# Altium PCB PCBnew.PcbDoc (part 2 of 2)
Units mil, origin at the board's own origin, x right, y up, seen from the top; angles counter-clockwise.
Board outline 9000 x 6005 mil, 4 copper layers (Top Layer, Power, Ground, Bottom Layer); 90 components, 127 nets, 639 pads, 900 vias.
Unrouted connection lines stored in the file: 161.
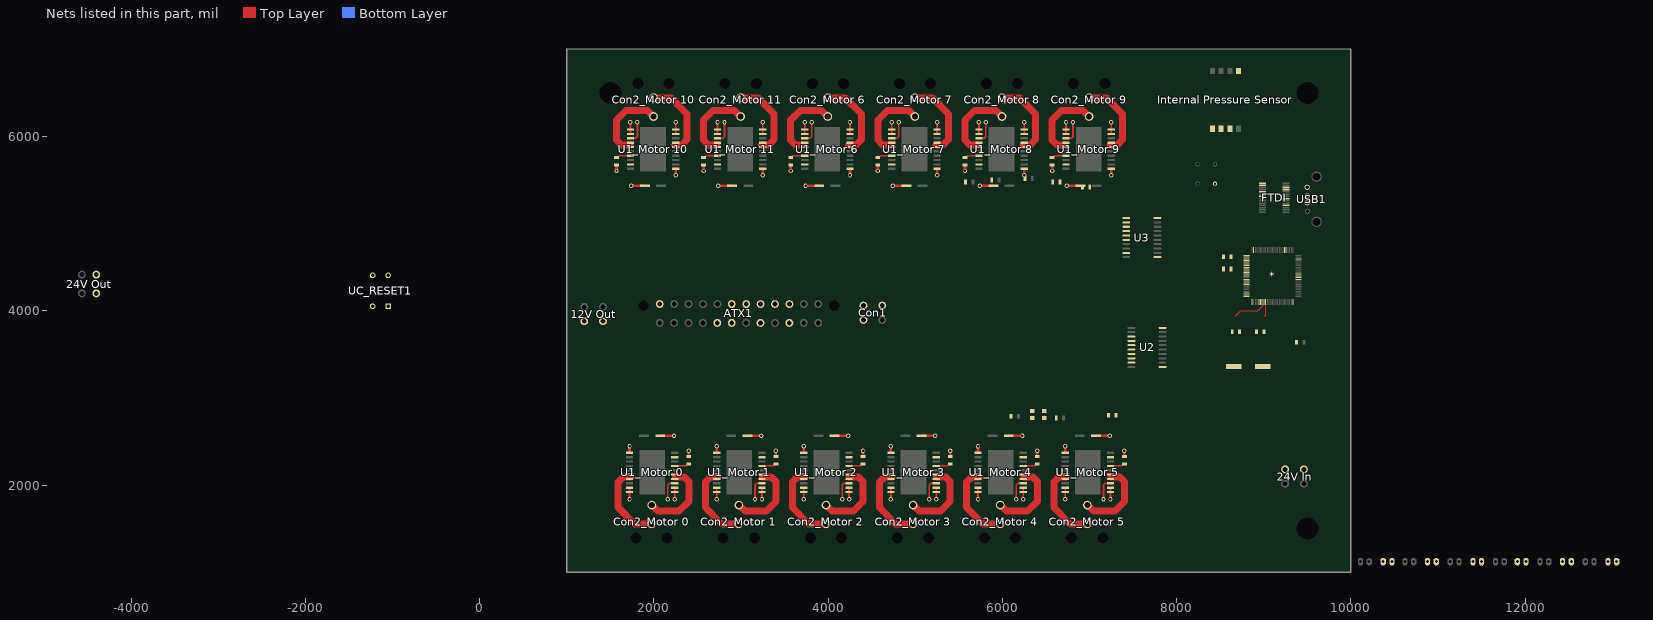
[diagram p4: the nets of this part, all layers, seen from the top]

## Via types
v1: diameter 30, hole 15, Top Layer to Bottom Layer, tented top, 792 vias
v2: diameter 50, hole 28, Top Layer to Bottom Layer, 108 vias

## Nets (pads, with @x,y where several pads share a name; then routed paths per layer and width w, separated by ;. In a path a pad name is that pad's centre, name@x,y a point inside that pad or via, vN(x,y) a via of type N, cw(c..) or ccw(c..) an arc to the next point about the centre after c; other vN are vias at no path point) (continued)
GND: "12V Out.2" "12V Out.3" "24V In.2" "24V In.3" "24V Out.2" "24V Out.3" "C9_Motor 0.1" "C9_Motor 1.1" "C9_Motor 2.1" "C9_Motor 3.1" "C9_Motor 4.1" "C9_Motor 5.1" "C9_Motor 6.1" "C9_Motor 7.1" "C9_Motor 8.1" "C9_Motor 9.1" "C9_Motor 10.1" "C9_Motor 11.1" "C10_Motor 0.N" "C10_Motor 1.N" "C10_Motor 2.N" "C10_Motor 3.N" "C10_Motor 4.N" "C10_Motor 5.N" "C10_Motor 6.N" "C10_Motor 7.N" "C10_Motor 8.N" "C10_Motor 9.N" "C10_Motor 10.N" "C10_Motor 11.N" "Internal Pressure Sensor.3" "U1_Motor 0.1" "U1_Motor 0.9" "U1_Motor 0.10" "U1_Motor 0.11" "U1_Motor 0.12" "U1_Motor 1.1" "U1_Motor 1.9" "U1_Motor 1.10" "U1_Motor 1.11" "U1_Motor 1.12" "U1_Motor 2.1" "U1_Motor 2.9" "U1_Motor 2.10" "U1_Motor 2.11" "U1_Motor 2.12" "U1_Motor 3.1" "U1_Motor 3.9" "U1_Motor 3.10" "U1_Motor 3.11" "U1_Motor 3.12" "U1_Motor 4.1" "U1_Motor 4.9" "U1_Motor 4.10" "U1_Motor 4.11" "U1_Motor 4.12" "U1_Motor 5.1" "U1_Motor 5.9" "U1_Motor 5.10" "U1_Motor 5.11" "U1_Motor 5.12" "U1_Motor 6.1" "U1_Motor 6.9" "U1_Motor 6.10" "U1_Motor 6.11" "U1_Motor 6.12" "U1_Motor 7.1" "U1_Motor 7.9" "U1_Motor 7.10" "U1_Motor 7.11" "U1_Motor 7.12" "U1_Motor 8.1" "U1_Motor 8.9" "U1_Motor 8.10" "U1_Motor 8.11" "U1_Motor 8.12" "U1_Motor 9.1" "U1_Motor 9.9" "U1_Motor 9.10" "U1_Motor 9.11" "U1_Motor 9.12" "U1_Motor 10.1" "U1_Motor 10.9" "U1_Motor 10.10" "U1_Motor 10.11" "U1_Motor 10.12" "U1_Motor 11.1" "U1_Motor 11.9" "U1_Motor 11.10" "U1_Motor 11.11" "U1_Motor 11.12" *.11 *.32 *.62 *.81 *.99 ATX1.3 ATX1.5 ATX1.7 ATX1.15 ATX1.17 ATX1.18 ATX1.19 ATX1.24 C1.1 C2.1 C3.1 C5.2 C6.1 C7.2 C8.1 Con1.2 Con1.3 FTDI.7 FTDI.18 FTDI.21 FTDI.25 FTDI.26 P7.1 P7.2 P8.1 P8.2 P9.1 P9.2 P10.1 P10.2 P11.1 P11.2 P12.1 P12.2 U2.1 U2.10 U2.19 U3.1 U3.10 U3.19 UC_RESET1.1 UC_RESET1.3 USB1.4 | length 6841.6
  Top Layer w20: v2(1720.16,1835.16) 1720.16,1920 1720.16,1970 ; 1730.16,6030 1730.16,6080 v2(1730.16,6164.84) ; v2(2239.84,1835.16) 2239.84,1920 2239.84,1970 ; 2249.84,6030 2249.84,6080 v2(2249.84,6164.84) ; v2(2720.16,1835.16) 2720.16,1920 2720.16,1970 ; 2730.16,6030 2730.16,6080 v2(2730.16,6164.84) ; v2(3239.84,1835.16) 3239.84,1920 3239.84,1970 ; 3249.84,6030 3249.84,6080 v2(3249.84,6164.84) ; v2(3720.16,1835.16) 3720.16,1920 3720.16,1970 ; 3730.16,6030 3730.16,6080 v2(3730.16,6164.84) ; v2(4239.84,1835.16) 4239.84,1920 4239.84,1970 ; 4249.84,6030 4249.84,6080 v2(4249.84,6164.84) ; v2(4720.16,1835.16) 4720.16,1920 4720.16,1970 ; 4730.16,6030 4730.16,6080 v2(4730.16,6164.84) ; v2(5239.84,1835.16) 5239.84,1920 5239.84,1970 ; 5249.84,6030 5249.84,6080 v2(5249.84,6164.84) ; v2(5720.16,1835.16) 5720.16,1920 5720.16,1970 ; 5730.16,6030 5730.16,6080 v2(5730.16,6164.84) ; v2(6239.84,1835.16) 6239.84,1920 6239.84,1970 ; 6249.84,6030 6249.84,6080 v2(6249.84,6164.84) ; v2(6720.16,1835.16) 6720.16,1920 6720.16,1970 ; 6730.16,6030 6730.16,6080 v2(6730.16,6164.84) ; v2(7239.84,1835.16) 7239.84,1920 7239.84,1970 ; 7249.84,6030 7249.84,6080 v2(7249.84,6164.84)
  Top Layer w30: v2(1570,5605) 1570,5672.68 ; 1720.16,2370 v2(1720.16,2444.84) ; v2(1740,5435) 1897.48,5435 ; 2072.52,2565 v2(2230,2565) ; v2(2249.84,5555.16) 2249.84,5630 ; 2400,2327.32 v2(2400,2395) ; v2(2570,5605) 2570,5672.68 ; 2720.16,2370 v2(2720.16,2444.84) ; v2(2740,5435) 2897.48,5435 ; 3072.52,2565 v2(3230,2565) ; v2(3249.84,5555.16) 3249.84,5630 ; 3400,2327.32 v2(3400,2395) ; v2(3570,5605) 3570,5672.68 ; 3720.16,2370 v2(3720.16,2444.84) ; v2(3740,5435) 3897.48,5435 ; 4072.52,2565 v2(4230,2565) ; v2(4249.84,5555.16) 4249.84,5630 ; 4400,2327.32 v2(4400,2395) ; v2(4570,5605) 4570,5672.68 ; 4720.16,2370 v2(4720.16,2444.84) ; v2(4740,5435) 4897.48,5435 ; 5072.52,2565 v2(5230,2565) ; v2(5249.84,5555.16) 5249.84,5630 ; 5400,2327.32 v2(5400,2395) ; v2(5570,5605) 5570,5672.68 ; 5720.16,2370 v2(5720.16,2444.84) ; v2(5740,5435) 5897.48,5435 ; 6072.52,2565 v2(6230,2565) ; v2(6249.84,5555.16) 6249.84,5630 ; 6400,2327.32 v2(6400,2395) ; v2(6570,5605) 6570,5672.68 ; 6720.16,2370 v2(6720.16,2444.84) ; v2(6740,5435) 6897.48,5435 ; 7072.52,2565 v2(7230,2565) ; v2(7249.84,5555.16) 7249.84,5630 ; 7400,2327.32 v2(7400,2395)
  Bottom Layer w20: v2(1720.16,1835.16) v2@1720.32,1835 ; v2@1730,6164.69 v2(1730.16,6164.84) ; v2(2239.84,1835.16) v2@2240,1835.32 ; v2@2249.68,6165 v2(2249.84,6164.84) ; v2(2720.16,1835.16) v2@2720.32,1835 ; v2@2730,6164.69 v2(2730.16,6164.84) ; v2(3239.84,1835.16) v2@3240,1835.32 ; v2@3249.68,6165 v2(3249.84,6164.84) ; v2(3720.16,1835.16) v2@3720.32,1835 ; v2@3730,6164.69 v2(3730.16,6164.84) ; v2(4239.84,1835.16) v2@4240,1835.32 ; v2@4249.69,6165 v2(4249.84,6164.84) ; v2(4720.16,1835.16) v2@4720.31,1835 ; v2@4730,6164.69 v2(4730.16,6164.84) ; v2(5239.84,1835.16) v2@5240,1835.32 ; v2@5249.69,6165 v2(5249.84,6164.84) ; v2(5720.16,1835.16) v2@5720.31,1835 ; v2@5730,6164.69 v2(5730.16,6164.84) ; v2(6239.84,1835.16) v2@6240,1835.32 ; v2@6249.69,6165 v2(6249.84,6164.84) ; v2(6720.16,1835.16) v2@6720.31,1835 ; v2@6730,6164.69 v2(6730.16,6164.84) ; v2(7239.84,1835.16) v2@7240,1835.32 ; v2@7249.69,6165 v2(7249.84,6164.84)
KILLSWITCH: W1.1
"MOTOR+_Motor 0": "Con2_Motor 0.1" "U1_Motor 0.6" "U1_Motor 0.7" | length 998.9
  Top Layer w10: 1720.16,2070 1720.16,2080.16 1735,2095 ; 1720.16,2120 1735,2105.16 1735,2095 ; 1735,2084.84 1735,2095
  Top Layer w80: 1735,2095 1650,2095 1590,2035 1590,1740 1775,1555 1975,1555
"MOTOR+_Motor 1": "Con2_Motor 1.1" "U1_Motor 1.6" "U1_Motor 1.7" | length 998.9
  Top Layer w10: 2720.16,2070 2720.16,2080.16 2735,2095 ; 2720.16,2120 2735,2105.16 2735,2095 ; 2735,2084.84 2735,2095
  Top Layer w80: 2735,2095 2650,2095 2590,2035 2590,1740 2775,1555 2975,1555
"MOTOR+_Motor 2": "Con2_Motor 2.1" "U1_Motor 2.6" "U1_Motor 2.7" | length 998.9
  Top Layer w10: 3720.16,2070 3720.16,2080.16 3735,2095 ; 3720.16,2120 3735,2105.16 3735,2095 ; 3735,2084.84 3735,2095
  Top Layer w80: 3735,2095 3650,2095 3590,2035 3590,1740 3775,1555 3975,1555
"MOTOR+_Motor 3": "Con2_Motor 3.1" "U1_Motor 3.6" "U1_Motor 3.7" | length 998.9
  Top Layer w10: 4720.16,2070 4720.16,2080.16 4735,2095 ; 4720.16,2120 4735,2105.16 4735,2095 ; 4735,2084.84 4735,2095
  Top Layer w80: 4735,2095 4650,2095 4590,2035 4590,1740 4775,1555 4975,1555
"MOTOR+_Motor 4": "Con2_Motor 4.1" "U1_Motor 4.6" "U1_Motor 4.7" | length 998.9
  Top Layer w10: 5720.16,2070 5720.16,2080.16 5735,2095 ; 5720.16,2120 5735,2105.16 5735,2095 ; 5735,2084.84 5735,2095
  Top Layer w80: 5735,2095 5650,2095 5590,2035 5590,1740 5775,1555 5975,1555
"MOTOR+_Motor 5": "Con2_Motor 5.1" "U1_Motor 5.6" "U1_Motor 5.7" | length 998.9
  Top Layer w10: 6720.16,2070 6720.16,2080.16 6735,2095 ; 6720.16,2120 6735,2105.16 6735,2095 ; 6735,2084.84 6735,2095
  Top Layer w80: 6735,2095 6650,2095 6590,2035 6590,1740 6775,1555 6975,1555
"MOTOR+_Motor 6": "Con2_Motor 6.1" "U1_Motor 6.6" "U1_Motor 6.7" | length 998.9
  Top Layer w10: 4235,5915.16 4235,5905 ; 4249.84,5880 4235,5894.84 4235,5905 ; 4249.84,5930 4249.84,5919.84 4235,5905
  Top Layer w80: 3995,6445 4195,6445 4380,6260 4380,5965 4320,5905 4235,5905
"MOTOR+_Motor 7": "Con2_Motor 7.1" "U1_Motor 7.6" "U1_Motor 7.7" | length 998.9
  Top Layer w10: 5235,5915.16 5235,5905 ; 5249.84,5880 5235,5894.84 5235,5905 ; 5249.84,5930 5249.84,5919.84 5235,5905
  Top Layer w80: 4995,6445 5195,6445 5380,6260 5380,5965 5320,5905 5235,5905
"MOTOR+_Motor 8": "Con2_Motor 8.1" "U1_Motor 8.6" "U1_Motor 8.7" | length 998.9
  Top Layer w10: 6235,5915.16 6235,5905 ; 6249.84,5880 6235,5894.84 6235,5905 ; 6249.84,5930 6249.84,5919.84 6235,5905
  Top Layer w80: 5995,6445 6195,6445 6380,6260 6380,5965 6320,5905 6235,5905
"MOTOR+_Motor 9": "Con2_Motor 9.1" "U1_Motor 9.6" "U1_Motor 9.7" | length 998.9
  Top Layer w10: 7235,5915.16 7235,5905 ; 7249.84,5880 7235,5894.84 7235,5905 ; 7249.84,5930 7249.84,5919.84 7235,5905
  Top Layer w80: 6995,6445 7195,6445 7380,6260 7380,5965 7320,5905 7235,5905
"MOTOR+_Motor 10": "Con2_Motor 10.1" "U1_Motor 10.6" "U1_Motor 10.7" | length 998.9
  Top Layer w10: 2235,5915.16 2235,5905 ; 2249.84,5880 2235,5894.84 2235,5905 ; 2249.84,5930 2249.84,5919.84 2235,5905
  Top Layer w80: 1995,6445 2195,6445 2380,6260 2380,5965 2320,5905 2235,5905
"MOTOR+_Motor 11": "Con2_Motor 11.1" "U1_Motor 11.6" "U1_Motor 11.7" | length 998.9
  Top Layer w10: 3235,5915.16 3235,5905 ; 3249.84,5880 3235,5894.84 3235,5905 ; 3249.84,5930 3249.84,5919.84 3235,5905
  Top Layer w80: 2995,6445 3195,6445 3380,6260 3380,5965 3320,5905 3235,5905
"MOTOR-_Motor 0": "Con2_Motor 0.2" "U1_Motor 0.14" "U1_Motor 0.15" | length 907.3
  Top Layer w80: 1975,1770 2045,1700 2290,1700 2400,1810 2400,2040 2345,2095 2245,2095
"MOTOR-_Motor 1": "Con2_Motor 1.2" "U1_Motor 1.14" "U1_Motor 1.15" | length 907.3
  Top Layer w80: 2975,1770 3045,1700 3290,1700 3400,1810 3400,2040 3345,2095 3245,2095
"MOTOR-_Motor 2": "Con2_Motor 2.2" "U1_Motor 2.14" "U1_Motor 2.15" | length 907.3
  Top Layer w80: 3975,1770 4045,1700 4290,1700 4400,1810 4400,2040 4345,2095 4245,2095
"MOTOR-_Motor 3": "Con2_Motor 3.2" "U1_Motor 3.14" "U1_Motor 3.15" | length 907.3
  Top Layer w80: 4975,1770 5045,1700 5290,1700 5400,1810 5400,2040 5345,2095 5245,2095
"MOTOR-_Motor 4": "Con2_Motor 4.2" "U1_Motor 4.14" "U1_Motor 4.15" | length 907.3
  Top Layer w80: 5975,1770 6045,1700 6290,1700 6400,1810 6400,2040 6345,2095 6245,2095
"MOTOR-_Motor 5": "Con2_Motor 5.2" "U1_Motor 5.14" "U1_Motor 5.15" | length 907.3
  Top Layer w80: 6975,1770 7045,1700 7290,1700 7400,1810 7400,2040 7345,2095 7245,2095
"MOTOR-_Motor 6": "Con2_Motor 6.2" "U1_Motor 6.14" "U1_Motor 6.15" | length 907.3
  Top Layer w80: 3725,5905 3625,5905 3570,5960 3570,6190 3680,6300 3925,6300 3995,6230
"MOTOR-_Motor 7": "Con2_Motor 7.2" "U1_Motor 7.14" "U1_Motor 7.15" | length 907.3
  Top Layer w80: 4725,5905 4625,5905 4570,5960 4570,6190 4680,6300 4925,6300 4995,6230
"MOTOR-_Motor 8": "Con2_Motor 8.2" "U1_Motor 8.14" "U1_Motor 8.15" | length 907.3
  Top Layer w80: 5725,5905 5625,5905 5570,5960 5570,6190 5680,6300 5925,6300 5995,6230
"MOTOR-_Motor 9": "Con2_Motor 9.2" "U1_Motor 9.14" "U1_Motor 9.15" | length 907.3
  Top Layer w80: 6725,5905 6625,5905 6570,5960 6570,6190 6680,6300 6925,6300 6995,6230
"MOTOR-_Motor 10": "Con2_Motor 10.2" "U1_Motor 10.14" "U1_Motor 10.15" | length 907.3
  Top Layer w80: 1725,5905 1625,5905 1570,5960 1570,6190 1680,6300 1925,6300 1995,6230
"MOTOR-_Motor 11": "Con2_Motor 11.2" "U1_Motor 11.14" "U1_Motor 11.15" | length 907.3
  Top Layer w80: 2725,5905 2625,5905 2570,5960 2570,6190 2680,6300 2925,6300 2995,6230
Net*_4: "Internal Pressure Sensor.1" *.4
Net*_8: "Internal Pressure Sensor.5" *.8
Net*_9: "Internal Pressure Sensor.2" *.9
Net*_73: *.73 C7.1 R5.1
NetC4_2: C4.2 FTDI.2
"NetC9_Motor 0_2": "C9_Motor 0.2" "U1_Motor 0.17" | length 158.4
  Top Layer w20: 2239.84,2220 2370,2220 2390,2240
"NetC9_Motor 1_2": "C9_Motor 1.2" "U1_Motor 1.17" | length 158.4
  Top Layer w20: 3239.84,2220 3370,2220 3390,2240
"NetC9_Motor 2_2": "C9_Motor 2.2" "U1_Motor 2.17" | length 158.4
  Top Layer w20: 4239.84,2220 4370,2220 4390,2240
"NetC9_Motor 3_2": "C9_Motor 3.2" "U1_Motor 3.17" | length 158.4
  Top Layer w20: 5239.84,2220 5370,2220 5390,2240
"NetC9_Motor 4_2": "C9_Motor 4.2" "U1_Motor 4.17" | length 158.4
  Top Layer w20: 6239.84,2220 6370,2220 6390,2240
"NetC9_Motor 5_2": "C9_Motor 5.2" "U1_Motor 5.17" | length 158.4
  Top Layer w20: 7239.84,2220 7370,2220 7390,2240
"NetC9_Motor 6_2": "C9_Motor 6.2" "U1_Motor 6.17" | length 158.4
  Top Layer w20: 3580,5760 3600,5780 3730.16,5780
"NetC9_Motor 7_2": "C9_Motor 7.2" "U1_Motor 7.17" | length 158.4
  Top Layer w20: 4580,5760 4600,5780 4730.16,5780
"NetC9_Motor 8_2": "C9_Motor 8.2" "U1_Motor 8.17" | length 158.4
  Top Layer w20: 5580,5760 5600,5780 5730.16,5780
"NetC9_Motor 9_2": "C9_Motor 9.2" "U1_Motor 9.17" | length 158.4
  Top Layer w20: 6580,5760 6600,5780 6730.16,5780
"NetC9_Motor 10_2": "C9_Motor 10.2" "U1_Motor 10.17" | length 158.4
  Top Layer w20: 1580,5760 1600,5780 1730.16,5780
"NetC9_Motor 11_2": "C9_Motor 11.2" "U1_Motor 11.17" | length 158.4
  Top Layer w20: 2580,5760 2600,5780 2730.16,5780
NetCon1_4: Con1.4 R5.2
NetFTDI_1: FTDI.1 R1.2
NetFTDI_5: FTDI.5 R2.2
PD7: *.50
PS-ON: ATX1.16
PWM0: "U1_Motor 0.13" *.6 | length 253.1
  Top Layer w20: v2(2160,1835) 2160,2000 2180,2020 2239.84,2020
PWM1: "U1_Motor 1.13" *.7 | length 253.1
  Top Layer w20: v2(3160,1835) 3160,2000 3180,2020 3239.84,2020
PWM2: "U1_Motor 2.13" *.5 | length 253.1
  Top Layer w20: v2(4160,1835) 4160,2000 4180,2020 4239.84,2020
PWM3: "U1_Motor 3.13" *.1 | length 253.1
  Top Layer w20: v2(5160,1835) 5160,2000 5180,2020 5239.84,2020
PWM4: "U1_Motor 4.13" *.15 | length 253.1
  Top Layer w20: v2(6160,1835) 6160,2000 6180,2020 6239.84,2020
PWM5: "U1_Motor 5.13" *.16 | length 253.1
  Top Layer w20: v2(7160,1835) 7160,2000 7180,2020 7239.84,2020
PWM6: "U1_Motor 6.13" *.17 | length 253.1
  Top Layer w20: 3730.16,5980 3790,5980 3810,6000 v2(3810,6165)
PWM7: "U1_Motor 7.13" *.18 | length 253.1
  Top Layer w20: 4730.16,5980 4790,5980 4810,6000 v2(4810,6165)
PWM8: "U1_Motor 8.13" *.23 | length 253.1
  Top Layer w20: 5730.16,5980 5790,5980 5810,6000 v2(5810,6165)
PWM9: "U1_Motor 9.13" *.24 | length 253.1
  Top Layer w20: 6730.16,5980 6790,5980 6810,6000 v2(6810,6165)
PWM10: "U1_Motor 10.13" *.25 | length 253.1
  Top Layer w20: 1730.16,5980 1790,5980 1810,6000 v2(1810,6165)
PWM11: "U1_Motor 11.13" *.26 | length 253.1
  Top Layer w20: 2730.16,5980 2790,5980 2810,6000 v2(2810,6165)
PWR-OK: ATX1.8
RESET: *.30 C4.1 UC_RESET1.2 UC_RESET1.4
RLED: LED2.2 R4.1
RX2: *.12
RX3: *.63
"RX LED": LED2.1
TLED: LED1.2 R3.1
TX2: *.13
TX3: *.64
"TX LED": LED1.1
UC_RX: *.2 R1.1
UC_TX: *.3 R2.1
"USB DN": USB1.2
"USB DP": USB1.3
VCC: *.10 *.31 *.61 *.80
XTAL1: *.34 C8.2 Y1.2 | length 168.5
  Top Layer w10: 9007.32,3940 9021.26,3953.94 *.34@9021.26,4102.76
XTAL2: *.33 C6.2 Y1.1 | length 382.3
  Top Layer w10: 8672.68,3940 8732.68,4000 8932.57,4000 *.33@9001.57,4069.01
~DIR0: "U1_Motor 0.19" U2.13
~DIR1: "U1_Motor 1.19" U2.14
~DIR2: "U1_Motor 2.19" U2.15
~DIR3: "U1_Motor 3.19" U2.16
~DIR4: "U1_Motor 4.19" U2.17
~DIR5: "U1_Motor 5.19" U2.18
~DIR6: "U1_Motor 6.19" U3.14
~DIR7: "U1_Motor 7.19" U3.13
~DIR8: "U1_Motor 8.19" U3.12
~DIR9: "U1_Motor 9.19" U3.11
~DIR10: "U1_Motor 10.19" U3.16
~DIR11: "U1_Motor 11.19" U3.15
pads on no net: "24V Out.1" "Con2_Motor 0." "Con2_Motor 1." "Con2_Motor 2." "Con2_Motor 3." "Con2_Motor 4." "Con2_Motor 5." "Con2_Motor 6." "Con2_Motor 7." "Con2_Motor 8." "Con2_Motor 9." "Con2_Motor 10." "Con2_Motor 11." "Internal Pressure Sensor.4" "Internal Pressure Sensor.7" "Internal Pressure Sensor.8" "U1_Motor 0.2" "U1_Motor 0.8" "U1_Motor 0.20" "U1_Motor 0.21" "U1_Motor 1.2" "U1_Motor 1.8" "U1_Motor 1.20" "U1_Motor 1.21" "U1_Motor 2.2" "U1_Motor 2.8" "U1_Motor 2.20" "U1_Motor 2.21" "U1_Motor 3.2" "U1_Motor 3.8" "U1_Motor 3.20" "U1_Motor 3.21" "U1_Motor 4.2" "U1_Motor 4.8" "U1_Motor 4.20" "U1_Motor 4.21" "U1_Motor 5.2" "U1_Motor 5.8" "U1_Motor 5.20" "U1_Motor 5.21" "U1_Motor 6.2" "U1_Motor 6.8" "U1_Motor 6.20" "U1_Motor 6.21" "U1_Motor 7.2" "U1_Motor 7.8" "U1_Motor 7.20" "U1_Motor 7.21" "U1_Motor 8.2" "U1_Motor 8.8" "U1_Motor 8.20" "U1_Motor 8.21" "U1_Motor 9.2" "U1_Motor 9.8" "U1_Motor 9.20" "U1_Motor 9.21" "U1_Motor 10.2" "U1_Motor 10.8" "U1_Motor 10.20" "U1_Motor 10.21" "U1_Motor 11.2" "U1_Motor 11.8" "U1_Motor 11.20" "U1_Motor 11.21" *.14 *.19 *.20 *.21 *.22 *.27 *.28 *.29 *.43 *.44 *.45 *.46 *.47 *.48 *.49 *.51 *.52 *.53 *.54 *.55 *.56 *.57 *.58 *.59 *.60 *.65 *.66 *.67 *.68 *.69 *.70 *.72 *.79 *.98 ATX1.0 FTDI.3 FTDI.4 FTDI.6 FTDI.8 FTDI.9 FTDI.10 FTDI.11 FTDI.12 FTDI.13 FTDI.14 FTDI.15 FTDI.16 FTDI.17 FTDI.20 FTDI.22 FTDI.23 FTDI.24 FTDI.27 FTDI.28 U2.8 U2.9 U2.11 U2.12 U3.2 U3.3 U3.17 U3.18 USB1.CASE
copper on no net:
  other v1: 1861.89,1908.78 1909.13,1908.78 1956.38,1908.78 2003.62,1908.78 2050.87,1908.78 2098.11,1908.78 2861.89,1908.78 2909.13,1908.78 2956.38,1908.78 3003.62,1908.78 3050.87,1908.78 3098.11,1908.78 3861.89,1908.78 3909.13,1908.78 3956.38,1908.78 4003.62,1908.78 4050.87,1908.78 4098.11,1908.78 4861.89,1908.78 4909.13,1908.78 4956.38,1908.78 5003.62,1908.78 5050.87,1908.78 5098.11,1908.78 5861.89,1908.78 5909.13,1908.78 5956.38,1908.78 6003.62,1908.78 6050.87,1908.78 6098.11,1908.78 6861.89,1908.78 6909.13,1908.78 6956.38,1908.78 7003.62,1908.78 7050.87,1908.78 7098.11,1908.78 1861.89,1956.02 1909.13,1956.02 1956.38,1956.02 2003.62,1956.02 2050.87,1956.02 2098.11,1956.02 2861.89,1956.02 2909.13,1956.02 2956.38,1956.02 3003.62,1956.02 3050.87,1956.02 3098.11,1956.02 3861.89,1956.02 3909.13,1956.02 3956.38,1956.02 4003.62,1956.02 4050.87,1956.02 4098.11,1956.02 4861.89,1956.02 4909.13,1956.02 4956.38,1956.02 5003.62,1956.02 5050.87,1956.02 5098.11,1956.02 5861.89,1956.02 5909.13,1956.02 5956.38,1956.02 6003.62,1956.02 6050.87,1956.02 6098.11,1956.02 6861.89,1956.02 6909.13,1956.02 6956.38,1956.02 7003.62,1956.02 7050.87,1956.02 7098.11,1956.02 1861.89,2003.27 1909.13,2003.27 1956.38,2003.27 2003.62,2003.27 2050.87,2003.27 2098.11,2003.27 2861.89,2003.27 2909.13,2003.27 2956.38,2003.27 3003.62,2003.27 3050.87,2003.27 3098.11,2003.27 3861.89,2003.27 3909.13,2003.27 3956.38,2003.27 4003.62,2003.27 4050.87,2003.27 4098.11,2003.27 4861.89,2003.27 4909.13,2003.27 4956.38,2003.27 5003.62,2003.27 5050.87,2003.27 5098.11,2003.27 5861.89,2003.27 5909.13,2003.27 5956.38,2003.27 6003.62,2003.27 6050.87,2003.27 6098.11,2003.27 6861.89,2003.27 6909.13,2003.27 6956.38,2003.27 7003.62,2003.27 7050.87,2003.27 7098.11,2003.27 1861.89,2050.51 1909.13,2050.51 1956.38,2050.51 2003.62,2050.51 2050.87,2050.51 2098.11,2050.51 2861.89,2050.51 2909.13,2050.51 2956.38,2050.51 3003.62,2050.51 3050.87,2050.51 3098.11,2050.51 3861.89,2050.51 3909.13,2050.51 3956.38,2050.51 4003.62,2050.51 4050.87,2050.51 4098.11,2050.51 4861.89,2050.51 4909.13,2050.51 4956.38,2050.51 5003.62,2050.51 5050.87,2050.51 5098.11,2050.51 5861.89,2050.51 5909.13,2050.51 5956.38,2050.51 6003.62,2050.51 6050.87,2050.51 6098.11,2050.51 6861.89,2050.51 6909.13,2050.51 6956.38,2050.51 7003.62,2050.51 7050.87,2050.51 7098.11,2050.51 1861.89,2097.76 1909.13,2097.76 1956.38,2097.76 2003.62,2097.76 2050.87,2097.76 2098.11,2097.76 2861.89,2097.76 2909.13,2097.76 2956.38,2097.76 3003.62,2097.76 3050.87,2097.76 3098.11,2097.76 3861.89,2097.76 3909.13,2097.76 3956.38,2097.76 4003.62,2097.76 4050.87,2097.76 4098.11,2097.76 4861.89,2097.76 4909.13,2097.76 4956.38,2097.76 5003.62,2097.76 5050.87,2097.76 5098.11,2097.76 5861.89,2097.76 5909.13,2097.76 5956.38,2097.76 6003.62,2097.76 6050.87,2097.76 6098.11,2097.76 6861.89,2097.76 6909.13,2097.76 6956.38,2097.76 7003.62,2097.76 7050.87,2097.76 7098.11,2097.76 1861.89,2145 1909.13,2145 1956.38,2145 2003.62,2145 2050.87,2145 2098.11,2145 2861.89,2145 2909.13,2145 2956.38,2145 3003.62,2145 3050.87,2145 3098.11,2145 3861.89,2145 3909.13,2145 3956.38,2145 4003.62,2145 4050.87,2145 4098.11,2145 4861.89,2145 4909.13,2145 4956.38,2145 5003.62,2145 5050.87,2145 5098.11,2145 5861.89,2145 5909.13,2145 5956.38,2145 6003.62,2145 6050.87,2145 6098.11,2145 6861.89,2145 6909.13,2145 6956.38,2145 7003.62,2145 7050.87,2145 7098.11,2145 1861.89,2192.24 1909.13,2192.24 1956.38,2192.24 2003.62,2192.24 2050.87,2192.24 2098.11,2192.24 2861.89,2192.24 2909.13,2192.24 2956.38,2192.24 3003.62,2192.24 3050.87,2192.24 3098.11,2192.24 3861.89,2192.24 3909.13,2192.24 3956.38,2192.24 4003.62,2192.24 4050.87,2192.24 4098.11,2192.24 4861.89,2192.24 4909.13,2192.24 4956.38,2192.24 5003.62,2192.24 5050.87,2192.24 5098.11,2192.24 5861.89,2192.24 5909.13,2192.24 5956.38,2192.24 6003.62,2192.24 6050.87,2192.24 6098.11,2192.24 6861.89,2192.24 6909.13,2192.24 6956.38,2192.24 7003.62,2192.24 7050.87,2192.24 7098.11,2192.24 1861.89,2239.49 1909.13,2239.49 1956.38,2239.49 2003.62,2239.49 2050.87,2239.49 2098.11,2239.49 2861.89,2239.49 2909.13,2239.49 2956.38,2239.49 3003.62,2239.49 3050.87,2239.49 3098.11,2239.49 3861.89,2239.49 3909.13,2239.49 3956.38,2239.49 4003.62,2239.49 4050.87,2239.49 4098.11,2239.49 4861.89,2239.49 4909.13,2239.49 4956.38,2239.49 5003.62,2239.49 5050.87,2239.49 5098.11,2239.49 5861.89,2239.49 5909.13,2239.49 5956.38,2239.49 6003.62,2239.49 6050.87,2239.49 6098.11,2239.49 6861.89,2239.49 6909.13,2239.49 6956.38,2239.49 7003.62,2239.49 7050.87,2239.49 7098.11,2239.49 1861.89,2286.73 1909.13,2286.73 1956.38,2286.73 2003.62,2286.73 2050.87,2286.73 2098.11,2286.73 2861.89,2286.73 2909.13,2286.73 2956.38,2286.73 3003.62,2286.73 3050.87,2286.73 3098.11,2286.73 3861.89,2286.73 3909.13,2286.73 3956.38,2286.73 4003.62,2286.73 4050.87,2286.73 4098.11,2286.73 4861.89,2286.73 4909.13,2286.73 4956.38,2286.73 5003.62,2286.73 5050.87,2286.73 5098.11,2286.73 5861.89,2286.73 5909.13,2286.73 5956.38,2286.73 6003.62,2286.73 6050.87,2286.73 6098.11,2286.73 6861.89,2286.73 6909.13,2286.73 6956.38,2286.73 7003.62,2286.73 7050.87,2286.73 7098.11,2286.73 1861.89,2333.98 1909.13,2333.98 1956.38,2333.98 2003.62,2333.98 2050.87,2333.98 2098.11,2333.98 2861.89,2333.98 2909.13,2333.98 2956.38,2333.98 3003.62,2333.98 3050.87,2333.98 3098.11,2333.98 3861.89,2333.98 3909.13,2333.98 3956.38,2333.98 4003.62,2333.98 4050.87,2333.98 4098.11,2333.98 4861.89,2333.98 4909.13,2333.98 4956.38,2333.98 5003.62,2333.98 5050.87,2333.98 5098.11,2333.98 5861.89,2333.98 5909.13,2333.98 5956.38,2333.98 6003.62,2333.98 6050.87,2333.98 6098.11,2333.98 6861.89,2333.98 6909.13,2333.98 6956.38,2333.98 7003.62,2333.98 7050.87,2333.98 7098.11,2333.98 1861.89,2381.22 1909.13,2381.22 1956.38,2381.22 2003.62,2381.22 2050.87,2381.22 2098.11,2381.22 2861.89,2381.22 2909.13,2381.22 2956.38,2381.22 3003.62,2381.22 3050.87,2381.22 3098.11,2381.22 3861.89,2381.22 3909.13,2381.22 3956.38,2381.22 4003.62,2381.22 4050.87,2381.22 4098.11,2381.22 4861.89,2381.22 4909.13,2381.22 4956.38,2381.22 5003.62,2381.22 5050.87,2381.22 5098.11,2381.22 5861.89,2381.22 5909.13,2381.22 5956.38,2381.22 6003.62,2381.22 6050.87,2381.22 6098.11,2381.22 6861.89,2381.22 6909.13,2381.22 6956.38,2381.22 7003.62,2381.22 7050.87,2381.22 7098.11,2381.22 1871.89,5618.78 1919.13,5618.78 1966.38,5618.78 2013.62,5618.78 2060.87,5618.78 2108.11,5618.78 2871.89,5618.78 2919.13,5618.78 2966.38,5618.78 3013.62,5618.78 3060.87,5618.78 3108.11,5618.78 3871.89,5618.78 3919.13,5618.78 3966.38,5618.78 4013.62,5618.78 4060.87,5618.78 4108.11,5618.78 4871.89,5618.78 4919.13,5618.78 4966.38,5618.78 5013.62,5618.78 5060.87,5618.78 5108.11,5618.78 5871.89,5618.78 5919.13,5618.78 5966.38,5618.78 6013.62,5618.78 6060.87,5618.78 6108.11,5618.78 6871.89,5618.78 6919.13,5618.78 6966.38,5618.78 7013.62,5618.78 7060.87,5618.78 7108.11,5618.78 1871.89,5666.02 1919.13,5666.02 1966.38,5666.02 2013.62,5666.02 2060.87,5666.02 2108.11,5666.02 2871.89,5666.02 2919.13,5666.02 2966.38,5666.02 3013.62,5666.02 3060.87,5666.02 3108.11,5666.02 3871.89,5666.02 3919.13,5666.02 3966.38,5666.02 4013.62,5666.02 4060.87,5666.02 4108.11,5666.02 4871.89,5666.02 4919.13,5666.02 4966.38,5666.02 5013.62,5666.02 5060.87,5666.02 5108.11,5666.02 5871.89,5666.02 5919.13,5666.02 5966.38,5666.02 6013.62,5666.02 6060.87,5666.02 6108.11,5666.02 6871.89,5666.02 6919.13,5666.02 6966.38,5666.02 7013.62,5666.02 7060.87,5666.02 7108.11,5666.02 1871.89,5713.27 1919.13,5713.27 1966.38,5713.27 2013.62,5713.27 2060.87,5713.27 2108.11,5713.27 2871.89,5713.27 2919.13,5713.27 2966.38,5713.27 3013.62,5713.27 3060.87,5713.27 3108.11,5713.27 3871.89,5713.27 3919.13,5713.27 3966.38,5713.27 4013.62,5713.27 4060.87,5713.27 4108.11,5713.27 4871.89,5713.27 4919.13,5713.27 4966.38,5713.27 5013.62,5713.27 5060.87,5713.27 5108.11,5713.27 5871.89,5713.27 5919.13,5713.27 5966.38,5713.27 6013.62,5713.27 6060.87,5713.27 6108.11,5713.27 6871.89,5713.27 6919.13,5713.27 6966.38,5713.27 7013.62,5713.27 7060.87,5713.27 7108.11,5713.27 1871.89,5760.51 1919.13,5760.51 1966.38,5760.51 2013.62,5760.51 2060.87,5760.51 2108.11,5760.51 2871.89,5760.51 2919.13,5760.51 2966.38,5760.51 3013.62,5760.51 3060.87,5760.51 3108.11,5760.51 3871.89,5760.51 3919.13,5760.51 3966.38,5760.51 4013.62,5760.51 4060.87,5760.51 4108.11,5760.51 4871.89,5760.51 4919.13,5760.51 4966.38,5760.51 5013.62,5760.51 5060.87,5760.51 5108.11,5760.51 5871.89,5760.51 5919.13,5760.51 5966.38,5760.51 6013.62,5760.51 6060.87,5760.51 6108.11,5760.51 6871.89,5760.51 6919.13,5760.51 6966.38,5760.51 7013.62,5760.51 7060.87,5760.51 7108.11,5760.51 1871.89,5807.76 1919.13,5807.76 1966.38,5807.76 2013.62,5807.76 2060.87,5807.76 2108.11,5807.76 2871.89,5807.76 2919.13,5807.76 2966.38,5807.76 3013.62,5807.76 3060.87,5807.76 3108.11,5807.76 3871.89,5807.76 3919.13,5807.76 3966.38,5807.76 4013.62,5807.76 4060.87,5807.76 4108.11,5807.76 4871.89,5807.76 4919.13,5807.76 4966.38,5807.76 5013.62,5807.76 5060.87,5807.76 5108.11,5807.76 5871.89,5807.76 5919.13,5807.76 5966.38,5807.76 6013.62,5807.76 6060.87,5807.76 6108.11,5807.76 6871.89,5807.76 6919.13,5807.76 6966.38,5807.76 7013.62,5807.76 7060.87,5807.76 7108.11,5807.76 1871.89,5855 1919.13,5855 1966.38,5855 2013.62,5855 2060.87,5855 2108.11,5855 2871.89,5855 2919.13,5855 2966.38,5855 3013.62,5855 3060.87,5855 3108.11,5855 3871.89,5855 3919.13,5855 3966.38,5855 4013.62,5855 4060.87,5855 4108.11,5855 4871.89,5855 4919.13,5855 4966.38,5855 5013.62,5855 5060.87,5855 5108.11,5855 5871.89,5855 5919.13,5855 5966.38,5855 6013.62,5855 6060.87,5855 6108.11,5855 6871.89,5855 6919.13,5855 6966.38,5855 7013.62,5855 7060.87,5855 7108.11,5855 1871.89,5902.24 1919.13,5902.24 1966.38,5902.24 2013.62,5902.24 2060.87,5902.24 2108.11,5902.24 2871.89,5902.24 2919.13,5902.24 2966.38,5902.24 3013.62,5902.24 3060.87,5902.24 3108.11,5902.24 3871.89,5902.24 3919.13,5902.24 3966.38,5902.24 4013.62,5902.24 4060.87,5902.24 4108.11,5902.24 4871.89,5902.24 4919.13,5902.24 4966.38,5902.24 5013.62,5902.24 5060.87,5902.24 5108.11,5902.24 5871.89,5902.24 5919.13,5902.24 5966.38,5902.24 6013.62,5902.24 6060.87,5902.24 6108.11,5902.24 6871.89,5902.24 6919.13,5902.24 6966.38,5902.24 7013.62,5902.24 7060.87,5902.24 7108.11,5902.24 1871.89,5949.49 1919.13,5949.49 1966.38,5949.49 2013.62,5949.49 2060.87,5949.49 2108.11,5949.49 2871.89,5949.49 2919.13,5949.49 2966.38,5949.49 3013.62,5949.49 3060.87,5949.49 3108.11,5949.49 3871.89,5949.49 3919.13,5949.49 3966.38,5949.49 4013.62,5949.49 4060.87,5949.49 4108.11,5949.49 4871.89,5949.49 4919.13,5949.49 4966.38,5949.49 5013.62,5949.49 5060.87,5949.49 5108.11,5949.49 5871.89,5949.49 5919.13,5949.49 5966.38,5949.49 6013.62,5949.49 6060.87,5949.49 6108.11,5949.49 6871.89,5949.49 6919.13,5949.49 6966.38,5949.49 7013.62,5949.49 7060.87,5949.49 7108.11,5949.49 1871.89,5996.73 1919.13,5996.73 1966.38,5996.73 2013.62,5996.73 2060.87,5996.73 2108.11,5996.73 2871.89,5996.73 2919.13,5996.73 2966.38,5996.73 3013.62,5996.73 3060.87,5996.73 3108.11,5996.73 3871.89,5996.73 3919.13,5996.73 3966.38,5996.73 4013.62,5996.73 4060.87,5996.73 4108.11,5996.73 4871.89,5996.73 4919.13,5996.73 4966.38,5996.73 5013.62,5996.73 5060.87,5996.73 5108.11,5996.73 5871.89,5996.73 5919.13,5996.73 5966.38,5996.73 6013.62,5996.73 6060.87,5996.73 6108.11,5996.73 6871.89,5996.73 6919.13,5996.73 6966.38,5996.73 7013.62,5996.73 7060.87,5996.73 7108.11,5996.73 1871.89,6043.98 1919.13,6043.98 1966.38,6043.98 2013.62,6043.98 2060.87,6043.98 2108.11,6043.98 2871.89,6043.98 2919.13,6043.98 2966.38,6043.98 3013.62,6043.98 3060.87,6043.98 3108.11,6043.98 3871.89,6043.98 3919.13,6043.98 3966.38,6043.98 4013.62,6043.98 4060.87,6043.98 4108.11,6043.98 4871.89,6043.98 4919.13,6043.98 4966.38,6043.98 5013.62,6043.98 5060.87,6043.98 5108.11,6043.98 5871.89,6043.98 5919.13,6043.98 5966.38,6043.98 6013.62,6043.98 6060.87,6043.98 6108.11,6043.98 6871.89,6043.98 6919.13,6043.98 6966.38,6043.98 7013.62,6043.98 7060.87,6043.98 7108.11,6043.98 1871.89,6091.22 1919.13,6091.22 1966.38,6091.22 2013.62,6091.22 2060.87,6091.22 2108.11,6091.22 2871.89,6091.22 2919.13,6091.22 2966.38,6091.22 3013.62,6091.22 3060.87,6091.22 3108.11,6091.22 3871.89,6091.22 3919.13,6091.22 3966.38,6091.22 4013.62,6091.22 4060.87,6091.22 4108.11,6091.22 4871.89,6091.22 4919.13,6091.22 4966.38,6091.22 5013.62,6091.22 5060.87,6091.22 5108.11,6091.22 5871.89,6091.22 5919.13,6091.22 5966.38,6091.22 6013.62,6091.22 6060.87,6091.22 6108.11,6091.22 6871.89,6091.22 6919.13,6091.22 6966.38,6091.22 7013.62,6091.22 7060.87,6091.22 7108.11,6091.22

## Polygon pours and split planes (outlines as drawn)
GND on Ground (split plane): 9979.9,6979.91 9979.9,1020.1 1020.1,1020.1 1020.1,6984.89
+24V on Power (split plane): 9979.9,6979.91 9979.9,1020.1 1020.1,1020.1 1020.1,6984.89
+24V on Power (split plane): 7239.93,6853.76 7239.93,2960 7240.22,2957.06 7241.07,2954.23 7242.47,2951.63 7244.34,2949.34 7274.34,2919.34 7276.63,2917.47 7279.23,2916.07 7282.06,2915.22 7285,2914.93 9778.76,2914.93 9799.93,2893.76 9799.93,1295.07 9755,1295.07 9752.06,1294.78 9749.23,1293.93 9746.63,1292.53 9744.34,1290.66 9742.47,1288.37 9741.07,1285.77 9740.86,1285.07 1105.07,1285.07 1105.07,2803.76 1126.24,2824.93 5075,2824.93 5077.94,2825.22 5080.77,2826.07 5083.37,2827.47 5085.66,2829.34 5220.66,2964.34 5222.53,2966.63 5223.93,2969.23 5224.78,2972.06 5225.07,2975 5225.07,5060 5224.78,5062.94 5223.93,5065.77 5222.53,5068.37 5220.66,5070.66 5205.66,5085.66 5203.37,5087.53 5200.77,5088.93 5197.94,5089.78 5195,5090.07 1120.07,5090.07 1120.07,6899.93 7193.76,6899.93

## Other copper
Power (plane layer: these items are gaps in the copper):
  lines w30: 1090,1280 1090,2810 1120,2840 5075,2840 5210,2975 5210,5060 5195,5075 1130,5075 1105,5075 1105,6915 7200,6915 7255,6860 7255,2960 7285,2930 9785,2930 9815,2900 9815,1280 9755,1280 ; 1095,1270 9760,1270